# Altium PCB SDR_V2.PcbDoc (part 2 of 2)
Units mil, origin at the board's own origin, x right, y up, seen from the top; angles counter-clockwise.
Board outline 6000 x 4000 mil, 2 copper layers (Top Layer, Bottom Layer); 403 components, 321 nets, 1711 pads, 0 vias.
Unrouted connection lines stored in the file: 1226.
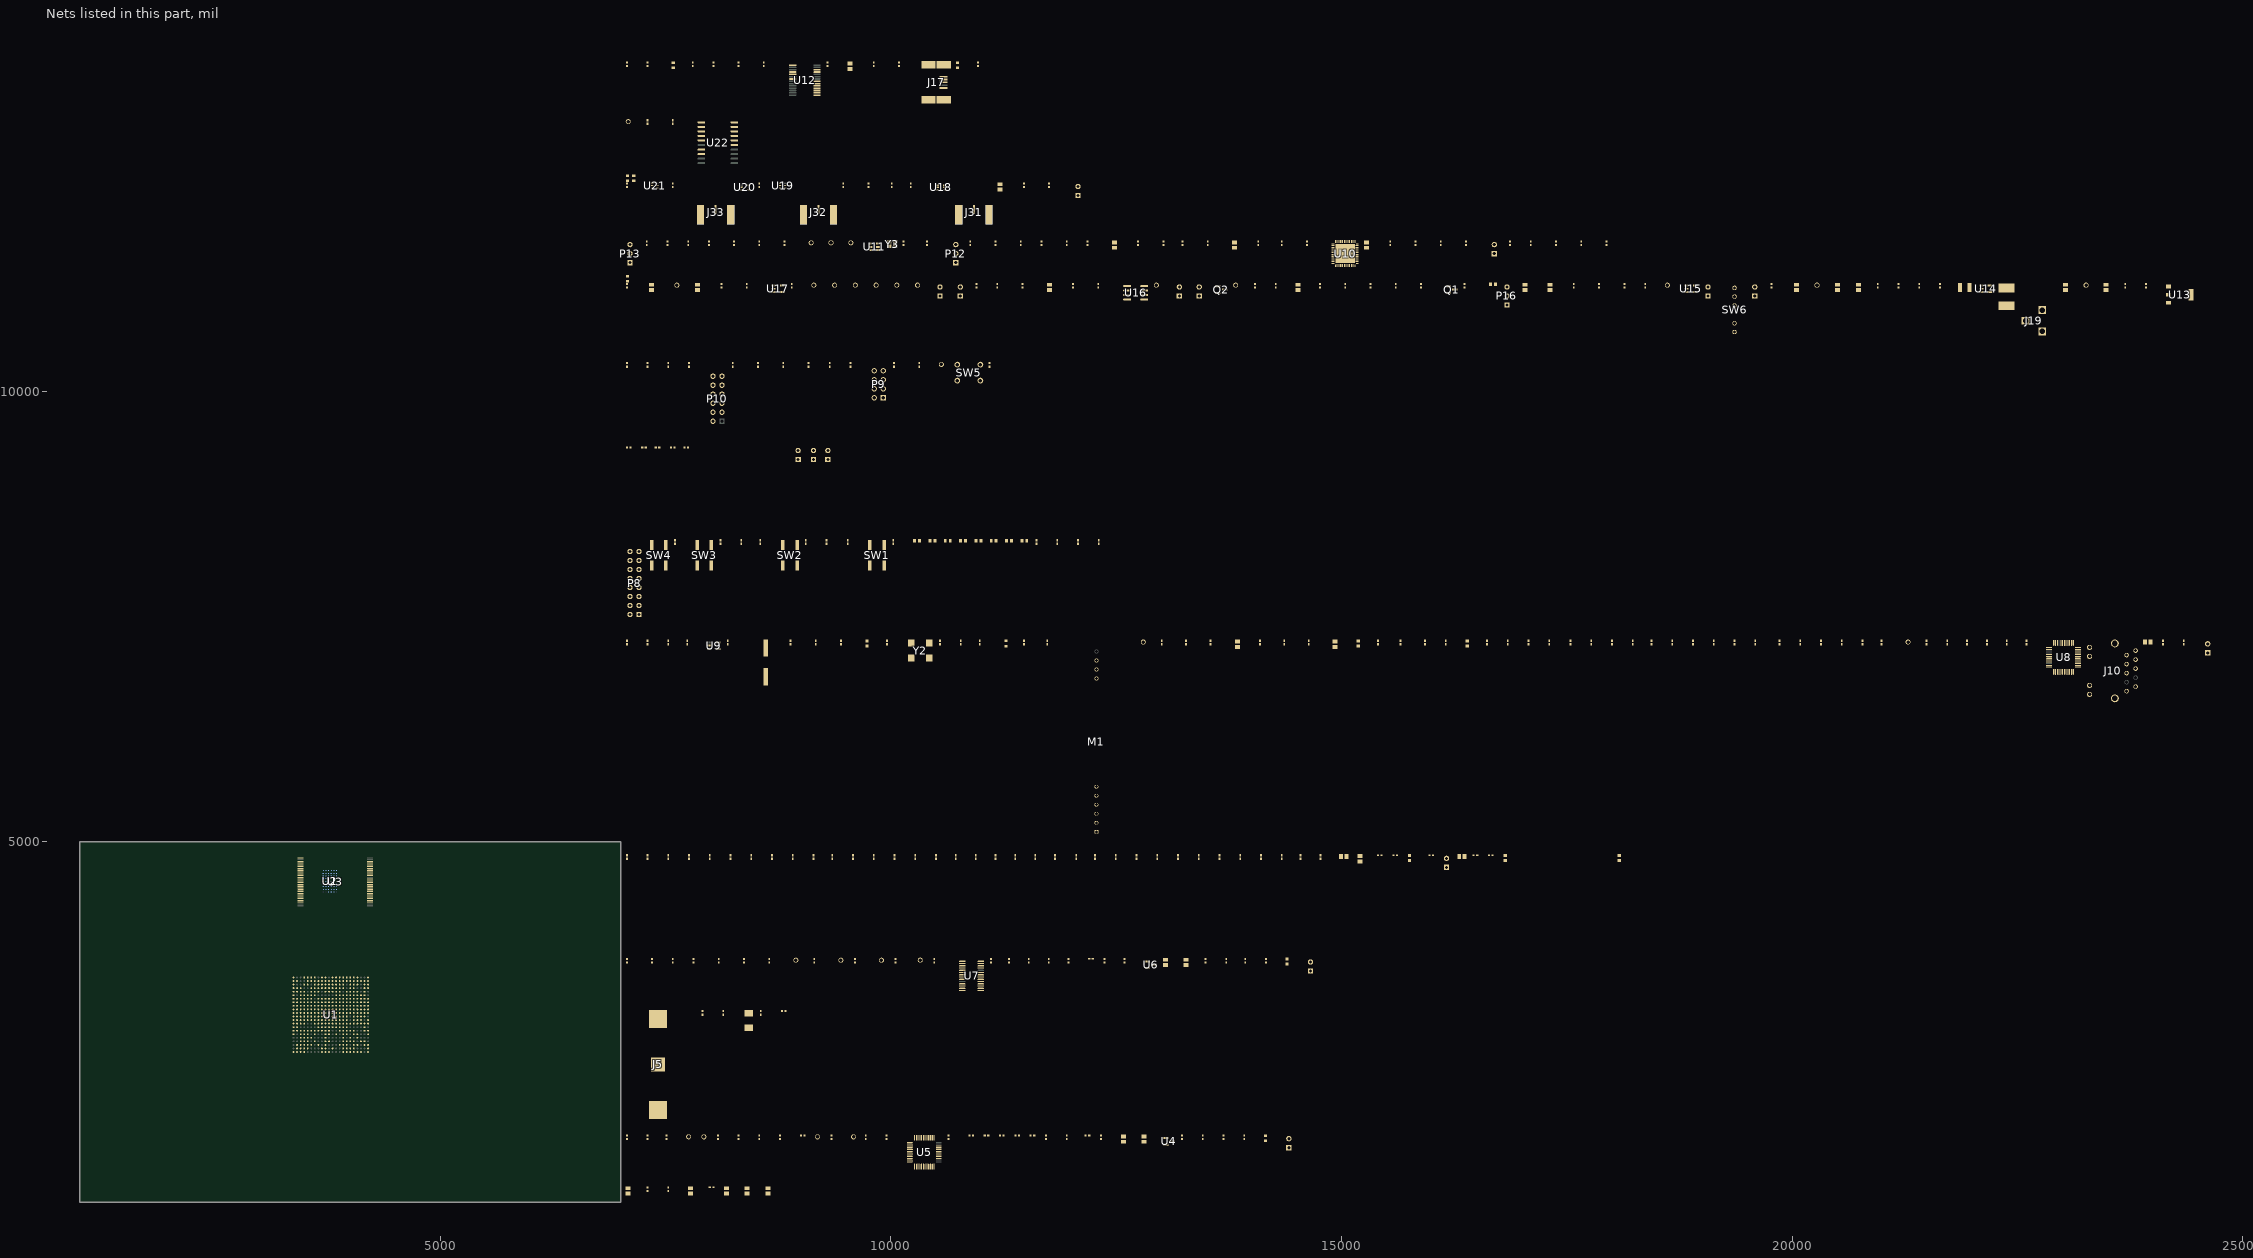
[diagram p2: the nets of this part, all layers, seen from the top]

## Part data
C1 C2 C3 C4 C5 C6 C8 C9 C12 C13 C14 C15 C16 C17 C18 C19 C20 C21 C22 C23 C24 C25 C26 C27 C28 C29 C30 C31 C32 C33 C34 C35 C36 C37 C38 C39 C40 C41 C42 C43 C44 C45 C46 C50 C51 C54 C55 C56 C57 C60 C61 C62 C63 C64 C65 C66 C67 C68 C69 C70 C71 C72 C73 C74 C75 C76 C77 C78 C79 C82 C83 C84 C85 C86 C87 C88 C89 C90 C91 C92 C93 C94 C96 C97 C98 C99 C101 C102 C103 C105 C106 C107 C108 C109 C110 C111 C112 C113 C115 C116 C117 C118 C119 C120 C121 C122 C123 C124 C125 C127 C128 C129 C130 C131 C133 C135 C136 C137 C138 C139 C140 C141 C142 C143 C144 C145 C146 C147 C149 C150 C151 C152 C153 C154 C157 C158 C159 C160 C161 C165 C166 C167 C170 C171 C172 C173 C174 C175 C177 C178 C180 C181 C182 C183 C186 C187 C188 C190 C191 C192 C193 C194 C195 C196: "Capacitor (Semiconductor SIM Model)"
C7 C10 C11 C47 C48 C49 C52 C53 C58 C59 C80 C81 C95 C100 C104 C126 C132 C134 C148 C155 C156 C162 C163 C164 C168 C169 C176 C179 C184 C185 C189: "Polarized Capacitor (Surface Mount)"
D1 D2 D3 D4 D5 D6 D7 D8 D9 D10: "Typical RED, GREEN, YELLOW, AMBER GaAs LED"
FB1 FB2 FB3 FB4 FB5 FB6 FB7 FB8 FB9 FB10 FB11 FB12: library part "Ferrite Bead", "FERRITE CHIP 30 OHM 1000MA 0603"
J1 J2 J3 J4 J6 J7 J8 J9 J11 J12 J13 J14 J15 J16 J18 J20 J21 J22 J23 J24 J25 J26 J27 J28 J29 J30 J34: library part TestPoint, "TEST POINT PC MINI .040\"D YELLOW"
J5: "HOLDER BATTERY COIN 20MM DIA SMD"
J10: library part "Ethernet Jack PoE", "CONN RJ45 8-8 W/TRANSFORMER"
J17: library part "Mini USB", "CONN RECEPT MINIUSB R/A 5POS SMD"
J19: "CONN PWR JACK 2.1X5.5MM HIGH CUR"
J31 J32 J33: library part SMA_connector, "CONN JACK END LAUNCH PC GOLD SMA"
L4: library part Inductor
M1: "Silver Telecom AG9205S POE"
P1 P2 P3 P4 P5 P6 P7 P11 P14 P15 P17 P18 P19 P20 P21: "Header, 2-Pin"
P8: "Header, 8-Pin, Dual row"
P9: "Header, 4-Pin, Dual row"
P10: "Header, 6-Pin, Dual row"
P12 P13 P16: "Header, 3-Pin"
Q1 Q2: "TRANSISTOR NPN GP 40V SOT23"
R1 R2 R3 R4 R5 R6 R7 R8 R9 R10 R11 R12 R13 R14 R15 R16 R17 R18 R19 R20 R21 R22 R23 R24 R25 R26 R27 R28 R29 R30 R31 R32 R33 R34 R35 R36 R37 R38 R39 R40 R41 R42 R43 R44 R45 R46 R47 R48 R49 R50 R51 R52 R53 R54 R55 R56 R57 R58 R59 R60 R61 R62 R63 R64 R65 R66 R67 R68 R69 R70 R71 R72 R73 R74 R75 R76 R77 R78 R79 R80 R81 R82 R83 R84 R85 R86 R87 R88 R89 R90 R91 R92: "Resistor"
SW1 SW2 SW3 SW4 SW5: "Switch"
SW6: "Switch Slide 4 postions"
U1: library part F2-200_500-FGG484_1, "FPGA - Field Programmable Gate Array 500K System Gates"
U2: library part "MT45W8MW16BGX-701 IT", "IC PSRAM 128MBIT 70NS 54VFBGA"
U3: library part S29GL064N, "Flash 3V 64Mb Float Gate highest address 90s"
U4 U6: library part MAX6061, "IC REF VOLT LDO SOT23-3"
U5: library part AD9288, "IC ADC 8BIT DUAL 100MSPS 48-LQFP"
U7: library part MAX5189, "IC DAC 8BIT DUAL 40MHZ 28-QSOP"
U8: "IC TXRX PHY 10/100 3.3V 48-LQFP"
U9: library part SN74LVC1G04DBV, "IC SINGLE INVERTER-GATE SOT-23-5"
U10: library part MAX2831, "RF Transceiver 2.4-2.5GHz 802.11g/b RF Transceiver"
U11: "IC ADC 8BIT 1MSPS SOT23-6"
U12: "USB to UART interface in SSOP-28 package"
U13: library part LT1117-3.3, "IC REG LDO 3.3V SOT-223"
U14: library part "TPS789 LDO", "IC 1.8V 100MA LDO REG SOT-23-5"
U15: library part TPS731, "IC LDO REG 150MA 1.5V SOT23-5"
U16: "IC SUPPLY VOLT SUPERVISOR 8-SOIC"
U17: library part REG102/103/104, "IC REG LDO 2.85V 250MA SOT23-5"
U18: "IC SW SPDT 0.1-3GHZ GAAS SC88"
U19 U21: library part "TDK chip Balun", "XFRMR BALUN RF 2.4GHZ SMD"
U20: "IC UNBUFFERED INVERTER LP 5TSSOP"
U22: "IC REAL TIME CLK/CALENDAR 20SOIC"
Y1: library part ABM3, "CRYSTAL 20.000MHZ 18PF SMD"
Y2: library part CB3_CB3LV, "OSC 50.000 MHZ 3.3V SMD"
Y3: library part CX-2520SB, "CRYSTAL 40.000MHZ 12PF SMD"

## Nets (pads, with @x,y where several pads share a name; then routed paths per layer and width w, separated by ;. In a path a pad name is that pad's centre, name@x,y a point inside that pad or via, vN(x,y) a via of type N, cw(c..) or ccw(c..) an arc to the next point about the centre after c; other vN are vias at no path point)
ADC_A0: U1.C21 U5.37
ADC_A1: U1.D21 U5.38
ADC_A2: U1.B20 U5.39
ADC_A3: U1.C19 U5.40
ADC_A4: U1.G19 U5.41
ADC_A5: U1.F19 U5.42
ADC_A6: U1.G21 U5.43
ADC_A7: U1.G20 U5.44
ADC_B0: U1.K17 U5.24
ADC_B1: U1.J17 U5.23
ADC_B2: U1.F21 U5.22
ADC_B3: U1.F20 U5.21
ADC_B4: U1.G18 U5.20
ADC_B5: U1.G17 U5.19
ADC_B6: U1.E18 U5.18
ADC_B7: U1.F17 U5.17
ADC_CLK: U1.A17 U5.14 U5.47
ADC_DFS: R9.2 U5.4
ADC_REF: U5.5 U5.6 U5.7
ADC_RX_I_BIAS_N: C65.2 R5.1 U5.3
ADC_RX_I_BIAS_P: C64.2 R4.1 U5.2
ADC_RX_I_N: C65.1 J2.1 U10.37
ADC_RX_I_P: C64.1 J1.1 U10.38
ADC_RX_Q_BIAS_N: C68.2 R6.1 U5.10
ADC_RX_Q_BIAS_P: C70.2 R7.1 U5.11
ADC_RX_Q_N: C68.1 J3.1 U10.35
ADC_RX_Q_P: C70.1 J4.1 U10.36
ADC_S1: R8.1 U1.D18
AGND: C5.1 C6.1 C7.2 C8.1 C9.1 C10.2 C39.1 C40.1 C41.1 C42.1 C43.1 C44.1 C45.1 C46.1 C47.2 C48.2 C49.2 C53.2 C56.1 C57.1 C59.2 C60.1 C63.1 C74.1 C75.1 C78.1 C79.1 C81.2 C82.1 C83.1 C90.1 C91.2 C119.2 C120.2 C121.2 C124.1 C125.1 C126.2 C127.1 C128.2 C129.2 C130.1 C131.1 C132.2 C133.1 C134.2 C135.2 C136.1 C137.1 C140.1 C141.1 C142.1 C143.1 C144.1 C187.1 C188.1 C189.2 FB1.1 J5.neg J31.2 J32.2 J33.2 R3.1 R11.2 U1.AA9 U1.AA10 U1.AA12 U1.AA15 U1.AB9 U1.AB15 U1.AB16 U1.AB17 U1.T10 U1.T11 U1.U11 U1.U13 U1.U15 U1.V15 U1.W7 U1.W10 U1.W16 U1.W18 U1.Y6 U1.Y8 U1.Y14 U4.3 U6.3 U7.4 U10.2 U10.26 U10.31 U10.47 U10.49 U11.2 U18.2 U19.2 U19.5 U21.2 U21.5 Y3.2 Y3.3 Y3.4
B1: U1.D7 U10.23
B2: U1.E8 U10.11
B3: U1.C4 U10.8
B4: U1.C5 U10.34
B5: U1.D8 U10.14
B6: U1.C7 U10.3
B7: U1.C8 U10.6
BBS: C196.2 U22.18
BYPASS: C128.1 U10.33
C\S\: R80.1 U10.15
CLK_50MHZ: R49.2 U1.E3
CLKOUT: J15.1 U10.21
CPOUT: C144.2 R76.1 R77.2 U10.24
CREF1: C88.2 U7.1
CREF2: C89.2 U7.28
DAC_CLK: U1.A18 U7.9
DAC_D0: U1.E1 U7.14
DAC_D1: U1.F3 U7.15
DAC_D2: U1.G4 U7.16
DAC_D3: U1.H5 U7.17
DAC_D4: U1.H6 U7.18
DAC_D5: U1.J6 U7.19
DAC_D6: U1.B22 U7.20
DAC_D7: U1.C22 U7.21
DAC_DACEN: R16.1 U1.F1
DAC_PD: R17.1 U1.G2
DAC_REFO: C90.2 U7.25
DGND: C1.1 C2.1 C3.1 C4.1 C11.2 C12.1 C13.1 C14.1 C15.1 C16.1 C17.1 C18.1 C19.1 C20.1 C21.1 C22.1 C23.1 C24.1 C25.1 C26.1 C27.1 C28.1 C29.1 C30.1 C31.1 C32.1 C33.1 C34.1 C35.1 C36.1 C37.1 C38.1 C50.1 C51.1 C52.2 C54.1 C55.1 C58.2 C61.2 C62.1 C66.1 C67.1 C69.1 C71.1 C72.1 C73.1 C76.1 C77.1 C80.2 C92.2 C93.1 C94.1 C95.2 C96.1 C97.1 C98.1 C99.1 C100.2 C101.1 C102.1 C103.1 C104.2 C105.1 C106.1 C107.1 C108.1 C109.1 C110.1 C111.1 C112.1 C113.1 C114.- C115.1 C116.1 C117.1 C118.1 C122.1 C123.1 C145.1 C146.1 C147.1 C148.2 C149.1 C150.1 C151.1 C152.1 C153.1 C154.1 C155.2 C156.2 C157.1 C158.1 C159.1 C160.1 C161.1 C162.2 C163.2 C164.2 C165.1 C166.1 C167.1 C168.2 C169.2 C170.1 C171.1 C172.1 C173.1 C174.1 C175.1 C176.2 C177.1 C178.1 C179.2 C180.1 C181.1 C182.1 C183.1 C184.2 C185.2 C186.1 C195.1 C196.1 D10.2 FB1.2 J17.5 J17.6 J19.2 J19.3 J24.1 J25.1 J26.1 J27.1 J28.1 J29.1 M1.7 P10.4 P10.5 P10.11 P10.12 P17.1 P17.2 P18.1 P18.2 P19.1 P19.2 P20.1 P20.2 Q1.2 R1.1 R22.1 R23.1 R31.2 R33.1 R35.1 R42.1 R44.1 R46.2 R66.1 R67.1 R68.1 R83.1 R84.1 R88.2 R89.1 SW1.2 SW1.4 SW2.2 SW2.4 SW3.2 SW3.4 SW4.2 SW4.4 U1.A1 U1.A4 U1.A7 U1.A10 U1.A13 U1.A16 U1.A19 U1.A22 U1.AB1 U1.AB4 U1.AB22 U1.B2 U1.B21 U1.C11 U1.D1 U1.D6 U1.D9 U1.D14 U1.D17 U1.D22 U1.E4 U1.E6 U1.E17 U1.E19 U1.F7 U1.F15 U1.G1 U1.G6 U1.G8 U1.G10 U1.G12 U1.G14 U1.G16 U1.G22 U1.H4 U1.H7 U1.H9 U1.H11 U1.H13 U1.H15 U1.H19 U1.J8 U1.J10 U1.J12 U1.J14 U1.J16 U1.K1 U1.K7 U1.K9 U1.K11 U1.K13 U1.K15 U1.K22 U1.L4 U1.L8 U1.L10 U1.L12 U1.L14 U1.L16 U1.L17 U1.M5 U1.M7 U1.M9 U1.M11 U1.M13 U1.M15 U1.M20 U1.N1 U1.N8 U1.N10 U1.N12 U1.N14 U1.N16 U1.N20 U1.N22 U1.P3 U1.P4 U1.P7 U1.P9 U1.P11 U1.P13 U1.P15 U1.P19 U1.R8 U1.R10 U1.R12 U1.R14 U1.T1 U1.T5 U1.T18 U1.T22 U1.U1 U1.U22 U1.V6 U1.V17 U1.W3 U1.W20 U2.D1 U2.E6 U2.J2 U2.J3 U3.33 U3.52 U5.1 U5.9 U5.12 U5.16 U5.27 U5.29 U5.32 U5.34 U5.45 U7.8 U7.11 U7.12 U7.13 U7.23 U8.8 U8.12 U8.23 U8.35 U8.36 U8.39 U8.43 U8.44 U9.3 U12.7 U12.18 U12.21 U12.25 U12.26 U13.1 U14.2 U14.3 U15.2 U16.4 U17.2 U20.3 U22.5 U22.8 U22.15 Y2.2
DIN: R79.1 U10.19
DPLX: R39.1 U8.28
EMC_AB1: U1.A9 U2.A3 U3.31
EMC_AB2: U1.B10 U2.A4 U3.26
EMC_AB3: U1.B11 U2.A5 U3.25
EMC_AB4: U1.E11 U2.B3 U3.24
EMC_AB5: U1.E12 U2.B4 U3.23
EMC_AB6: U1.B12 U2.C3 U3.22
EMC_AB7: U1.A12 U2.C4 U3.21
EMC_AB8: U1.C13 U2.D4 U3.20
EMC_AB9: U1.D13 U2.H2 U3.10
EMC_AB10: U1.D11 U2.H3 U3.9
EMC_AB11: U1.D12 U2.H4 U3.8
EMC_AB12: U1.A14 U2.H5 U3.7
EMC_AB13: U1.A15 U2.G3 U3.6
EMC_AB14: U1.B13 U2.G4 U3.5
EMC_AB15: U1.B14 U2.F3 U3.4
EMC_AB16: U1.C14 U2.F4 U3.3
EMC_AB17: U1.C15 U2.E4 U3.54
EMC_AB18: U1.B16 U2.D3 U3.19
EMC_AB19: U1.B17 U2.H1 U3.18
EMC_AB20: U1.F13 U2.G2 U3.11
EMC_AB21: U1.F14 U2.H6 U3.12
EMC_AB22: U1.C17 U2.E3 U3.15
EMC_AB23: U1.C18 U2.J4
EMC_BYTE_NEN0: U1.B9 U2.A1
EMC_BYTE_NEN1: U1.C9 U2.B2
EMC_DB0: U1.K2 U2.B6 U3.35
EMC_DB1: U1.K3 U2.C5 U3.37
EMC_DB2: U1.K5 U2.C6 U3.39
EMC_DB3: U1.J4 U2.D5 U3.41
EMC_DB4: U1.J3 U2.E5 U3.44
EMC_DB5: U1.J2 U2.F5 U3.46
EMC_DB6: U1.J1 U2.F6 U3.48
EMC_DB7: U1.H1 U2.G6 U3.50
EMC_DB8: U1.H3 U2.B1 U3.36
EMC_DB9: U1.G3 U2.C1 U3.38
EMC_DB10: U1.F4 U2.C2 U3.40
EMC_DB11: U1.G5 U2.D2 U3.42
EMC_DB12: U1.D2 U2.E2 U3.45
EMC_DB13: U1.D3 U2.F2 U3.47
EMC_DB14: U1.C1 U2.F1 U3.49
EMC_DB15: U1.B1 U2.G1 U3.51
EMC_NCS_FL: U1.A6 U3.32
EMC_NCS_RAM: U1.A5 U2.B5
EMC_NOE_FL: U1.C10 U3.34
EMC_NOE_RAM: U1.D10 U2.A2
EMC_NRW: U1.B6 U2.G5 U3.13
ETH_POE: C114.+ J12.1 M1.8 R45.2 SW6.5
J_GND: C110.2 J10.15 J10.16 R44.2
JTAG_TCK: R67.2 R70.2 U1.P18
JTAG_TDI: R72.2 U1.P17
JTAG_TDO: R73.1 U1.P21
JTAG_TMS: R71.1 U1.P20
JTAG_TRSTB: P10.8 R68.2 U1.P22
LED_ACT: R37.1 R43.1 U8.26
LED_SPD: R38.1 R40.1 U8.27
MSS_USER_IO0: P9.1 U1.T3
MSS_USER_IO1: P9.2 U1.V3
MSS_USER_IO2: P9.3 U1.U3
MSS_USER_IO3: P9.4 U1.T4
MSS_USER_IO4: P9.5 U1.AA2
MSS_USER_IO5: P9.6 U1.AB2
MSS_USER_IO6: P9.7 U1.AB3
MSS_USER_IO7: P9.8 U1.Y3
NetC63_2: C63.2 R2.1 R3.2 R4.2 R5.2 R6.2 R7.2
NetC74_2: C74.2 U1.AA16 Y1.1
NetC75_2: C75.2 U1.AA17 Y1.2
NetC83_2: C83.2 R10.2 R11.1 R12.2 R13.2 R14.2 R15.2
NetC98_2: C98.2 C99.2 FB6.1 U8.13
NetC100_1: C100.1 C101.2 C102.2 C103.2 FB7.1 U8.47
NetC112_2: C112.2 FB8.1 U9.5
NetC129_1: C129.1 R76.2 U10.32
NetC135_1: C135.1 R77.1
NetC138_1: C138.1 C139.2 U10.28
NetC138_2: C138.2 C140.2 U10.29
NetC139_1: C139.1 Y3.1
NetC152_2: C152.2 D9.1 U12.17
NetC157_2: C157.2 J19.1 L4.1
NetC165_2: C165.2 U14.4
NetC170_2: C170.2 U15.4
NetC180_2: C180.2 U16.1
NetC181_2: C181.2 U16.3
NetC186_2: C186.2 U17.4
NetC190_1: C190.1 U18.1
NetC191_2: C191.2 U18.5
NetC192_1: C192.1 U18.3
NetD1_2: D1.2 R64.2
NetD2_2: D2.2 R63.2
NetD3_2: D3.2 R62.2
NetD4_2: D4.2 R61.2
NetD5_2: D5.2 R60.2
NetD6_2: D6.2 R59.2
NetD7_2: D7.2 R58.2
NetD8_2: D8.2 R57.2
NetD9_2: D9.2 R84.2
NetD10_1: D10.1 R86.2
NetFB12_1: FB12.1 P21.2
NetJ10_12: J10.12 R40.2
NetJ10_14: J10.14 R43.2
NetM1_5: M1.5 R48.1
NetM1_6: M1.6 R48.2
NetM1_9: M1.9 R45.1 R46.1
NetP14_1: P14.1 P14.2 SW6.4
NetP15_2: P15.2 Q1.3 R85.1
NetQ1_1: Q1.1 R87.1 R88.1
NetQ2_1: Q2.1 U1.AB20
NetR1_2: R1.2 U2.A6
NetR2_2: R2.2 U4.2
NetR8_2: R8.2 U5.8
NetR10_1: R10.1 U6.2
NetR16_2: R16.2 U7.6
NetR17_2: R17.2 U7.7
NetR18_2: R18.2 U8.17
NetR20_1: R20.1 U8.46
NetR21_2: R21.2 U8.18
NetR22_2: R22.2 U8.19
NetR23_2: R23.2 U8.20
NetR26_2: R26.2 U8.6
NetR28_2: R28.2 U8.5
NetR29_2: R29.2 U8.9
NetR31_1: R31.1 U8.37
NetR32_2: R32.2 U8.21
NetR33_2: R33.2 U8.22
NetR34_1: R34.1 U8.30
NetR35_2: R35.2 U8.14
NetR36_1: R36.1 U8.25
NetR42_2: R42.2 U8.34
NetR47_2: R47.2 Y2.1
NetR49_1: R49.1 R50.1 Y2.3
NetR50_2: R50.2 U9.2
NetR51_1: R51.1 R52.1 U9.4
NetR53_1: R53.1 SW4.1 SW4.3 U1.E14
NetR54_1: R54.1 SW3.1 SW3.3 U1.D15
NetR55_1: R55.1 SW2.1 SW2.3 U1.B19
NetR56_1: R56.1 SW1.1 SW1.3 U1.J21
NetR66_2: R66.2 SW5.1 SW5.3
NetR69_2: R69.2 U1.R16
NetR75_2: R75.2 U10.48
NetR78_2: R78.2 U10.12
NetR82_1: R82.1 R83.2 U12.19
NetR89_2: R89.2 U16.6
NRESET: C115.2 J13.1 R65.1 SW5.2 SW5.4 U1.R1 U3.14 U8.48 U22.16
NWEN: R41.1 U8.29
PU_N: P15.1 U1.W17
RD_N: J10.2 R30.2 U8.32
RD_P: J10.1 R27.2 U8.33
RF_C\S\: P13.3 R80.2 U1.H20
RF_DIN: P13.1 R79.2 U1.J22
RF_LD: J16.1 U10.22
RF_R\X\/TX: R75.1 U1.L18 U18.6 U20.2
RF_RX/T\X\: U18.4 U20.4
RF_RX_ALT: J31.1 R91.1
RF_RX_UB: C192.2 R91.2 U19.1
RF_RXHP: R74.2 U10.40
RF_S\H\D\N\: R78.1 U1.M18
RF_SCLK: P13.2 R81.2 U1.L22
RF_SW_UB: C191.1 J33.1
RF_TX_ALT: J32.1 R92.1
RF_TX_I_BIAS_N: C85.1 U7.3
RF_TX_I_BIAS_P: C84.1 U7.2
RF_TX_I_N: C85.2 J7.1 R13.1 U10.44
RF_TX_I_P: C84.2 J6.1 R12.1 U10.45
RF_TX_Q_BIAS_N: C87.1 U7.26
RF_TX_Q_BIAS_P: C86.1 U7.27
RF_TX_Q_N: C87.2 J9.1 R15.1 U10.42
RF_TX_Q_P: C86.2 J8.1 R14.1 U10.43
RF_TX_UB: C190.2 R92.2 U21.1
RMII_CRSDV: R29.1 U1.W4
RMII_MDC: U1.AA3 U8.2
RMII_MDIO: R25.1 U1.V4 U8.1
RMII_REF_CLK: R51.2 U1.T6
RMII_REF_CLK_E: R52.2 U8.15
RMII_RX_ER: U1.AA4 U8.11
RMII_RXD0: R26.1 U1.V5
RMII_RXD1: R28.1 U1.U5
RMII_TXD0: R18.1 U1.AA5
RMII_TXD1: R21.1 U1.W5
RMII_TXEN: U1.Y4 U8.16
RSSI: J14.1 U10.16 U11.3
RSSI_C\S\: P12.1 U1.H17 U11.6
RSSI_SCLK: P12.3 U1.H18 U11.4
RSSI_SDATA: P12.2 U1.H22 U11.5
RTC_CLKOUT: J34.1 U1.AA18 U22.7
RTC_INT: U1.B7 U22.17
RTC_SCL: U1.AA22 U22.1
RTC_SDA: U1.W21 U22.4
RTC_SDI: U1.T17 U22.2
RTC_SDO: U1.V19 U22.3
RXRF_N: U10.5 U19.3
RXRF_P: U10.4 U19.4
SCLK: R81.1 U10.18
TCK: P10.2 R70.1
TD_N: J10.6 R24.2 U8.40
TD_P: J10.5 R19.2 U8.41
TDI: P10.6 R72.1
TDO: P10.9 R73.2
TMS: P10.3 R71.2
TXRF_C_N: C194.2 U21.3
TXRF_C_P: C193.2 U21.4
TXRF_N: C194.1 U10.10
TXRF_P: C193.1 U10.9
UART_0_RXD: U1.U18 U12.1
UART_0_TXD: U1.Y22 U12.5
UART_VCC: C146.2 C147.2 C148.1 FB10.2 R82.2 U12.20
USB_D_N: C151.2 J17.2 U12.16
USB_D_P: C150.2 J17.3 U12.15
USB_VCC: C149.2 FB9.1 FB10.1 J17.1
USER_IO0: P8.1 U1.N6
USER_IO1: P8.2 U1.M6
USER_IO2: P8.3 U1.P1
USER_IO3: P8.4 U1.P2
USER_IO4: P8.5 U1.N3
USER_IO5: P8.6 U1.N2
USER_IO6: P8.7 U1.M2
USER_IO7: P8.8 U1.M1
USER_IO8: P8.9 U1.M4
USER_IO9: P8.10 U1.L3
USER_IO10: P8.11 U1.L2
USER_IO11: P8.12 U1.L1
USER_IO12: P8.13 U1.L5
USER_IO13: P8.14 U1.K4
USER_IO14: P8.15 U1.L6
USER_IO15: P8.16 U1.K6
USER_LED0: R64.1 U1.J20
USER_LED1: R63.1 U1.J19
USER_LED2: R62.1 U1.K20
USER_LED3: R61.1 U1.K21
USER_LED4: R60.1 U1.L20
USER_LED5: R59.1 U1.L21
USER_LED6: R58.1 U1.K18
USER_LED7: R57.1 U1.K19
VAREFOUT: C47.1 C48.1 C49.1 C53.1 U1.AB11 U1.T14 U1.T15 U1.U10
VBAT: C195.2 J5.pos U1.AB19 U22.19
VCC1.5_EN: J22.1 R87.2 R90.2 U15.3 U16.5
VCC1.5_EXT: C166.2 C167.2 C169.1 P16.3 U15.5
VCC1.5_INT: C177.2 C178.2 C179.1 P16.1 Q2.2 U1.Y18
VCC1.5_SF: C32.2 C33.2 C34.2 C35.2 C36.2 C37.2 C38.2 FB2.1 J23.1 L1.2 L2.2 P16.2 U1.H8 U1.H10 U1.H12 U1.H14 U1.J9 U1.J11 U1.J13 U1.J15 U1.K8 U1.K10 U1.K12 U1.K14 U1.L9 U1.L11 U1.L13 U1.L15 U1.M8 U1.M10 U1.M12 U1.M14 U1.N9 U1.N11 U1.N13 U1.N15 U1.N19 U1.P8 U1.P10 U1.P12 U1.P14 U1.R9 U1.R11 U1.R13 U1.R15
VCC1.5A_SF: C5.2 C6.2 C7.1 C39.2 C40.2 C41.2 C42.2 FB2.2 U1.AB18 U1.T9 U1.W11 U1.Y10 U1.Y15 U1.Y16
VCC1.8: C158.2 C159.2 C163.1 J20.1 P2.2 U14.5
VCC1.8_SRAM: C4.2 P2.1 U2.D6
VCC2.5: C96.2 C97.2 C104.1 C105.2 C106.2 C107.2 FB6.2 FB7.2 J10.3 J10.4 J11.1 R19.1 R24.1 R27.1 R30.1 U8.31 U8.38 U8.42
VCC2.85: C182.2 C183.2 C185.1 J30.1 P21.1 U17.5
VCC2.85A_RF: C119.1 C120.1 C121.1 C127.2 C130.2 C131.2 C132.1 C136.2 C137.2 C142.2 C143.2 C187.2 C188.2 C189.1 FB12.2 U10.1 U10.17 U10.20 U10.25 U10.27 U10.30 U10.39 U10.41 U10.46
VCC3.3: C145.2 C153.2 C154.2 C155.1 D1.1 D2.1 D3.1 D4.1 D5.1 D6.1 D7.1 D8.1 J18.1 P1.2 P3.2 P4.1 P5.1 P6.1 P7.1 P10.7 P10.10 P11.1 R53.2 R54.2 R55.2 R56.2 R65.2 R85.2 U3.16 U3.53 U12.4 U13.2 U13.4 U22.20
VCC3.3_ADC: C54.2 C55.2 C58.1 C61.1 C66.2 C69.2 C72.2 FB4.1 P5.2 R9.1 U5.15 U5.28 U5.33 U5.46
VCC3.3_DAC: C76.2 C77.2 C80.1 C92.1 FB5.1 P6.2 U7.22
VCC3.3_ETH: C93.2 C94.2 C95.1 C108.2 C109.2 C111.2 C113.2 FB8.2 J10.11 J10.13 P7.2 R20.2 R25.2 R32.1 R34.2 R36.2 R37.2 R38.2 R39.2 R41.2 R47.1 U8.7 U8.24 Y2.4
VCC3.3_FLASH: C1.2 C2.2 P3.1 U3.29 U3.43
VCC3.3_RF: C122.2 C123.2 FB11.1 P11.2 R74.1 U20.5
VCC3.3_SF: C14.2 C15.2 C16.2 C17.2 C18.2 C19.2 C20.2 C21.2 C22.2 C23.2 C24.2 C25.2 C26.2 C27.2 C28.2 C29.2 C30.2 C31.2 C116.2 C117.2 C118.2 FB3.1 L3.1 P4.2 Q2.3 R69.1 U1.B5 U1.B8 U1.B15 U1.B18 U1.C12 U1.E2 U1.E7 U1.E10 U1.E13 U1.E16 U1.E21 U1.F5 U1.F18 U1.G9 U1.G11 U1.G13 U1.G15 U1.H2 U1.H16 U1.H21 U1.J5 U1.J7 U1.J18 U1.K16 U1.L7 U1.L19 U1.M3 U1.M16 U1.M19 U1.M21 U1.N5 U1.N7 U1.N18 U1.P16 U1.R2 U1.R21 U1.T2 U1.T7 U1.T16 U1.T21 U1.U4 U1.U19 U1.Y2 U1.Y5 U1.Y21
VCC3.3_SRAM: C3.2 P1.1 U2.E1
VCC3.3A_ADC: C56.2 C57.2 C59.1 C60.2 C62.2 C67.2 C71.2 FB4.2 U4.1 U5.13 U5.30 U5.31 U5.48
VCC3.3A_DAC: C78.2 C79.2 C81.1 C82.2 C88.1 C89.1 C91.1 FB5.2 U6.1 U7.5
VCC3.3A_RF: C124.2 C125.2 C126.1 C133.2 C134.1 C141.2 FB11.2 U10.7 U10.13 U11.1
VCC3.3A_SF: C8.2 C9.2 C10.1 C43.2 C44.2 C45.2 C46.2 FB3.2 U1.AB10 U1.T8 U1.U7 U1.U16 U1.V10 U1.W15 U1.Y19
VCC5: C156.1 C162.1 C168.1 C171.2 C172.2 C173.2 C174.2 C175.2 C176.1 C184.1 J21.1 R86.1 R90.1 SW6.3 U13.3 U14.1 U15.1 U16.2 U16.7 U16.8 U17.1 U17.3
VCC5_LDO: L4.2 SW6.1
VCC5_USB: C160.2 C161.2 C164.1 FB9.2 SW6.2
VCC_OSC: C73.2 L3.2 U1.N4
VCCPLLA: C11.1 C12.2 C13.2 L1.1 U1.F6
VCCPLLB: C50.2 C51.2 C52.1 L2.1 U1.F16
VIN+_JACK: J10.9 M1.1 M1.3
VIN-_JACK: J10.10 M1.2 M1.4
pads on no net: J10. J10.7 J10.8 J17.4 M1.10 P10.1 U1.A2 U1.A3 U1.A8 U1.A11 U1.A20 U1.A21 U1.AA1 U1.AA6 U1.AA7 U1.AA8 U1.AA11 U1.AA13 U1.AA14 U1.AA19 U1.AA20 U1.AA21 U1.AB5 U1.AB6 U1.AB7 U1.AB8 U1.AB12 U1.AB13 U1.AB14 U1.AB21 U1.B3 U1.B4 U1.C2 U1.C3 U1.C6 U1.C16 U1.C20 U1.D4 U1.D5 U1.D16 U1.D19 U1.D20 U1.E5 U1.E9 U1.E15 U1.E20 U1.E22 U1.F2 U1.F8 U1.F9 U1.F10 U1.F11 U1.F12 U1.F22 U1.G7 U1.M17 U1.M22 U1.N17 U1.N21 U1.P5 U1.P6 U1.R3 U1.R4 U1.R5 U1.R6 U1.R7 U1.R17 U1.R18 U1.R19 U1.R20 U1.R22 U1.T12 U1.T13 U1.T19 U1.T20 U1.U2 U1.U6 U1.U8 U1.U9 U1.U12 U1.U14 U1.U17 U1.U20 U1.U21 U1.V1 U1.V2 U1.V7 U1.V8 U1.V9 U1.V11 U1.V12 U1.V13 U1.V14 U1.V16 U1.V18 U1.V20 U1.V21 U1.V22 U1.W1 U1.W2 U1.W6 U1.W8 U1.W9 U1.W12 U1.W13 U1.W14 U1.W19 U1.W22 U1.Y1 U1.Y7 U1.Y9 U1.Y11 U1.Y12 U1.Y13 U1.Y17 U1.Y20 U2.J1 U2.J5 U2.J6 U3.1 U3.2 U3.17 U3.27 U3.28 U3.30 U3.55 U3.56 U5.25 U5.26 U5.35 U5.36 U7.10 U7.24 U8.3 U8.4 U8.10 U8.45 U9.1 U12.2 U12.3 U12.6 U12.8 U12.9 U12.10 U12.11 U12.12 U12.13 U12.14 U12.22 U12.23 U12.24 U12.27 U12.28 U19.6 U20.1 U21.6 U22.6 U22.9 U22.10 U22.11 U22.12 U22.13 U22.14

## Text inside footprints (layer, text, board x,y; h text height)
P8: Top Overlay "16" at 7125,8280 h50 r90; Top Overlay "15" at 7225,8280 h50 r90; Top Overlay "1" at 7225,7420 h50 r90; Top Overlay "2" at 7125,7420 h50 r90
P9: Top Overlay "8" at 9835,10285 h50 r90; Top Overlay "7" at 9935,10285 h50 r90; Top Overlay "1" at 9935,9845 h50 r90; Top Overlay "2" at 9835,9825 h50 r90
P10: Top Overlay "2" at 8045,9565 h50 r90; Top Overlay "1" at 8145,9565 h50 r90; Top Overlay "1" at 8145,10245 h50 r90; Top Overlay "1" at 8145,10285 h50 r90; Top Overlay "12" at 8045,10245 h50 r90